# EAGLE board CatGenie120 (EAGLE 7.6.0)
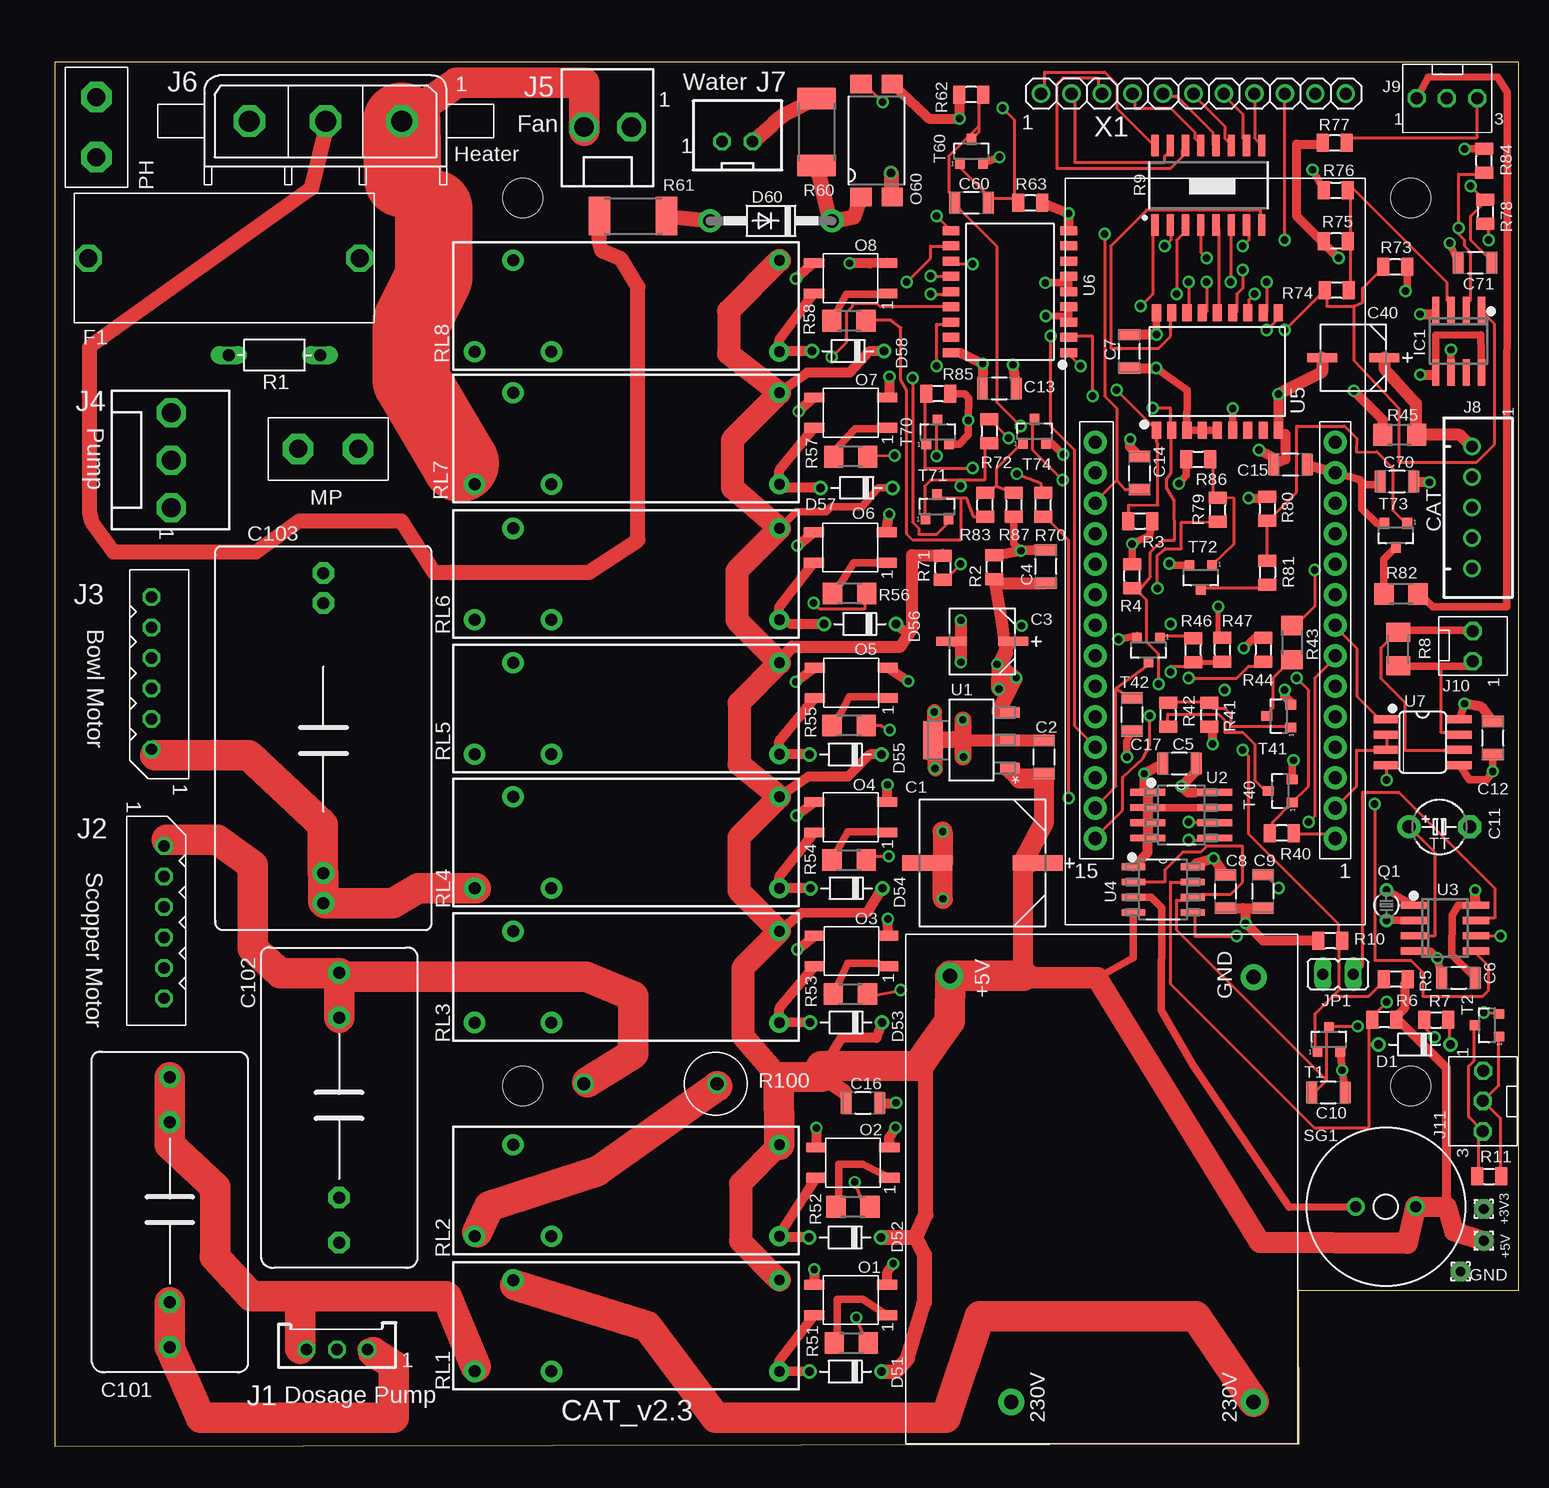
[diagram p0: board, top side]
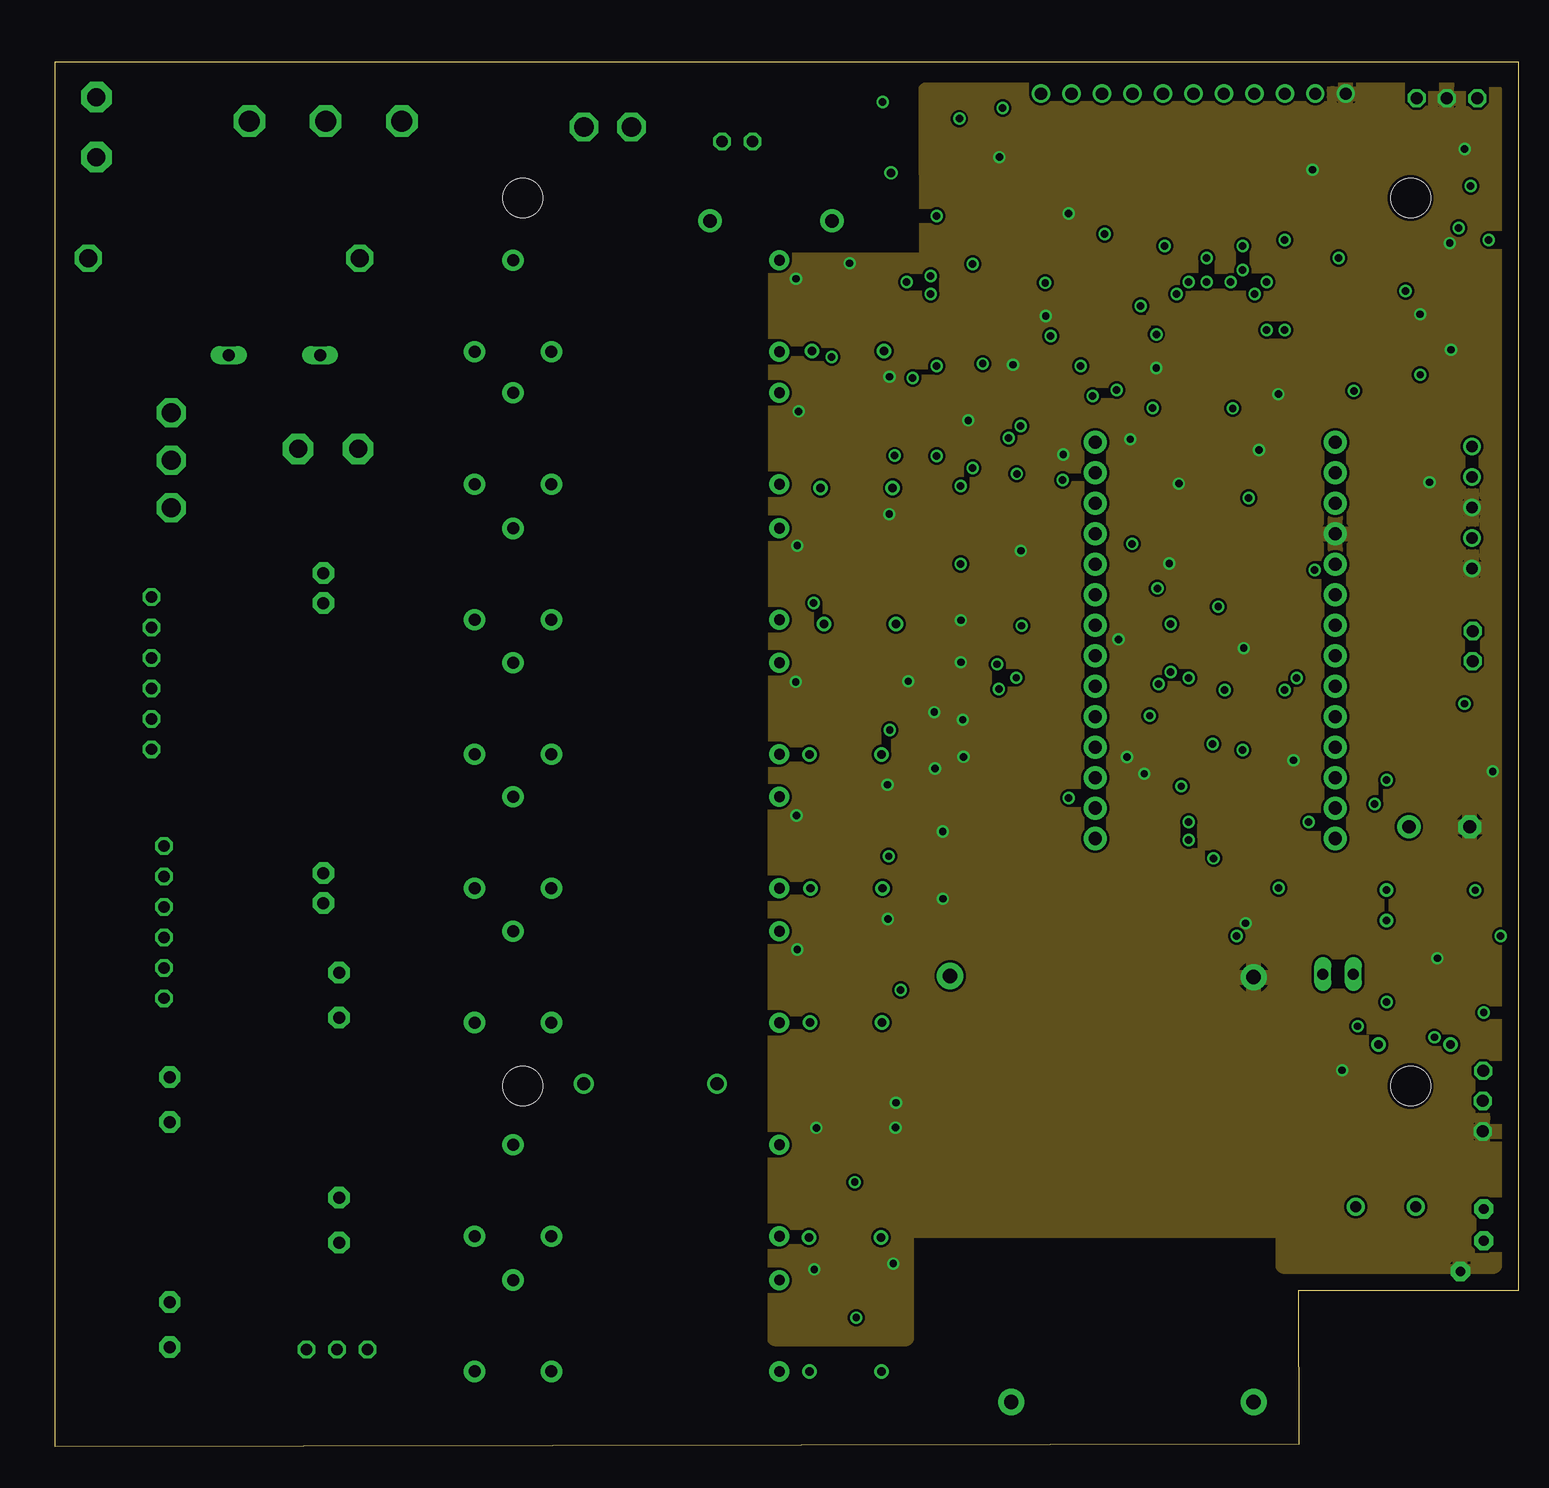
[diagram p1: board, inner layer Route2]
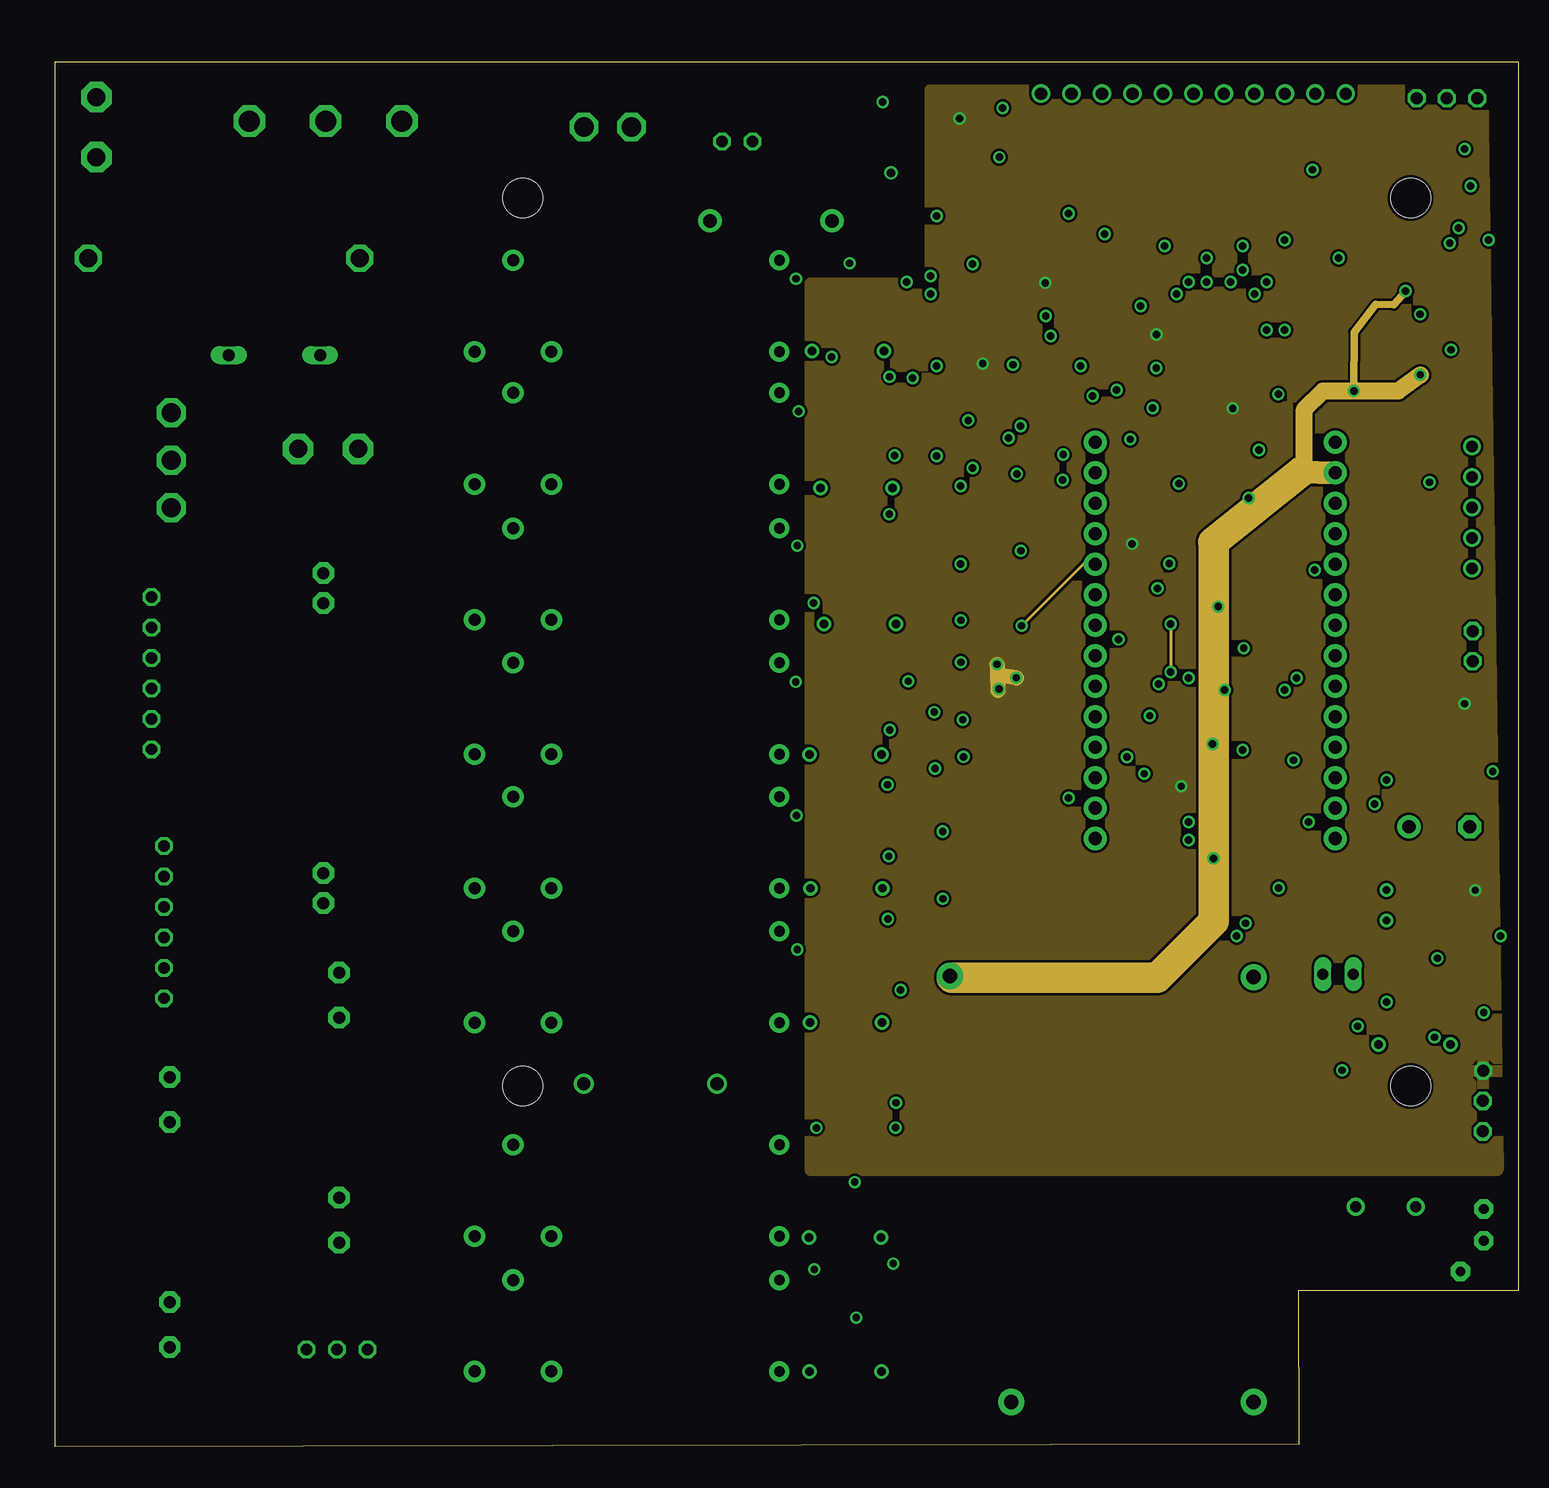
[diagram p2: board, inner layer Route15]
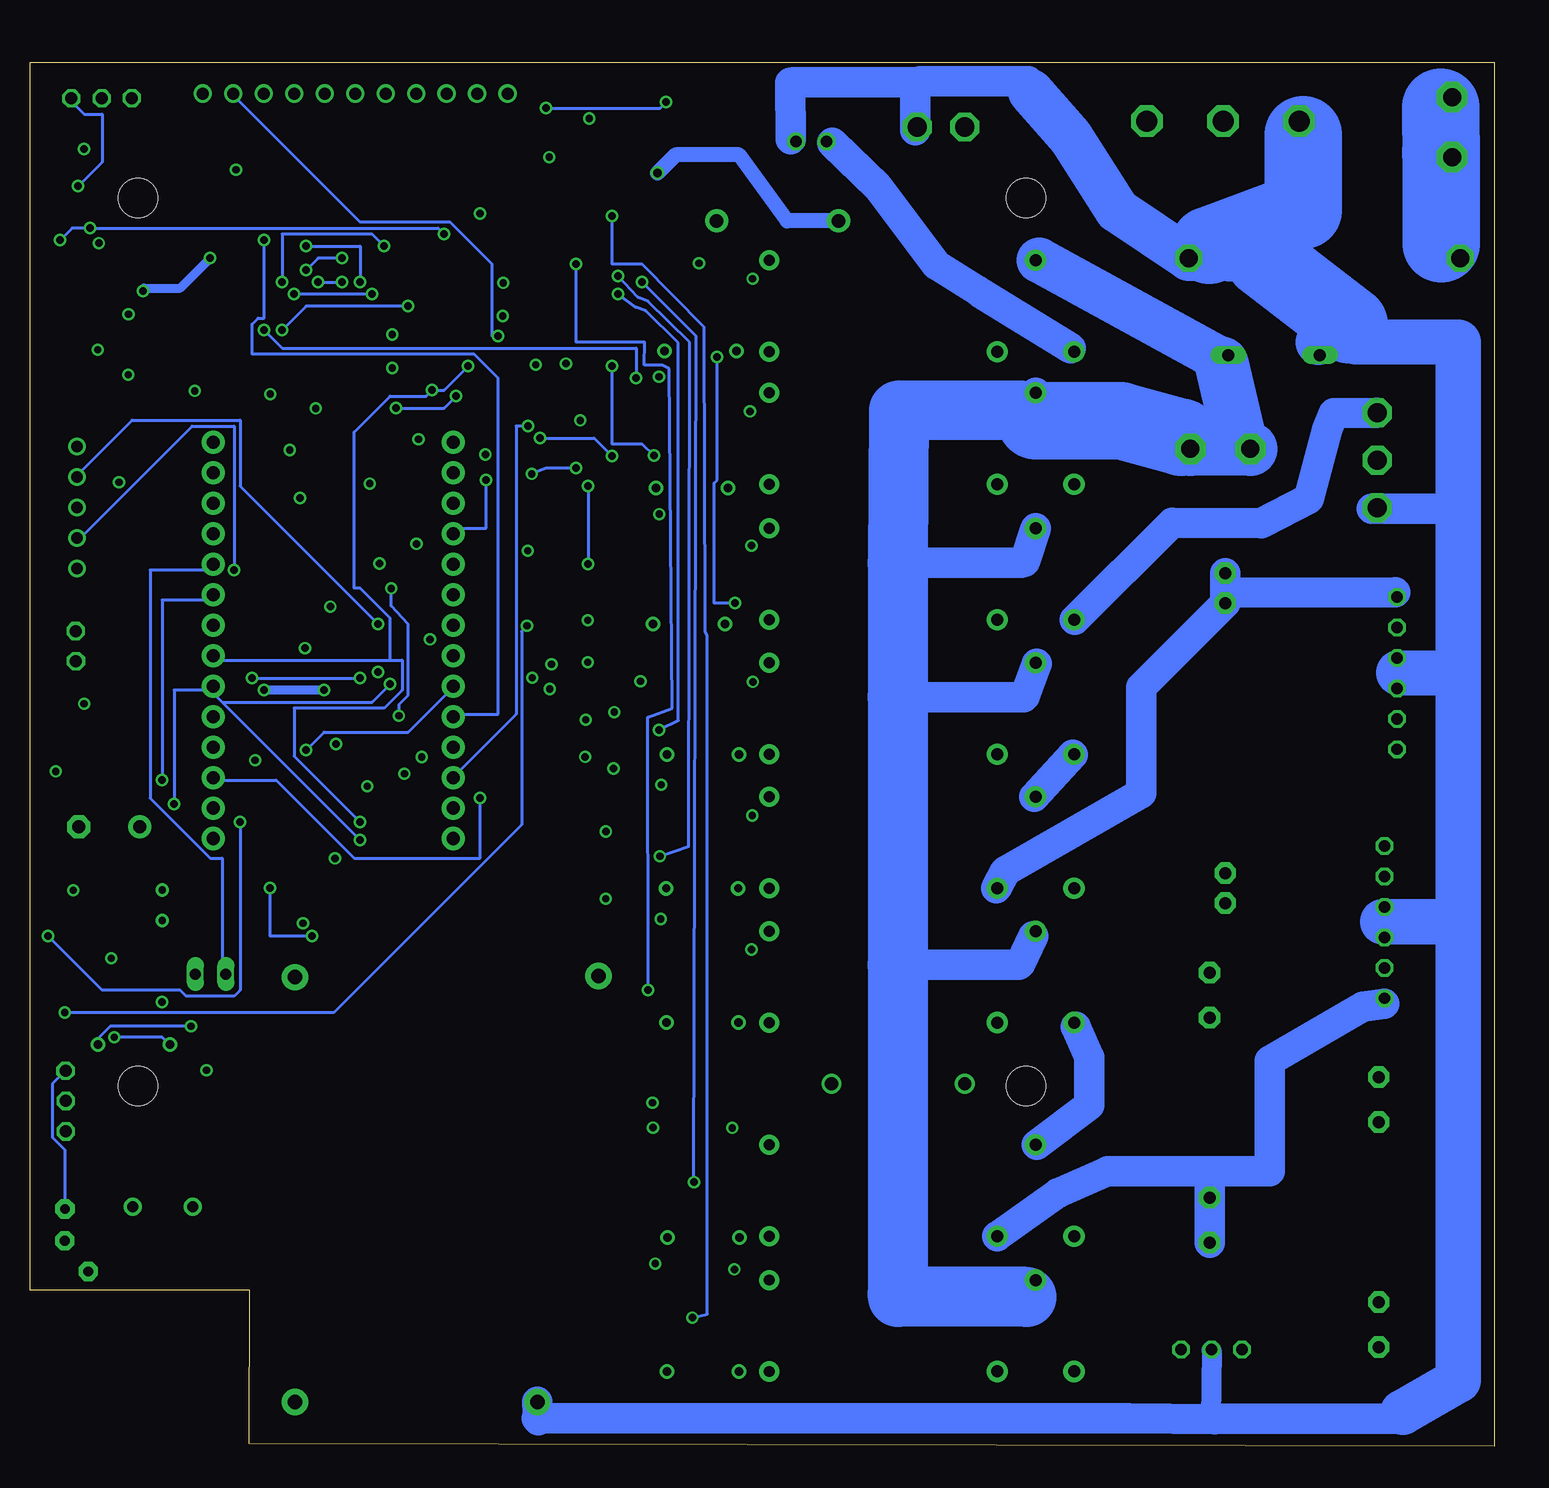
[diagram p3: board, bottom side, seen from below]

Size 122 x 115.3 mm. Coordinates in mm from the lower left corner, seen from the top.
Outline: 0,0 103.72,0.2 103.67,13 122,13 122,115.3 0,115.3 0,0
Copper layers (1+2*15+16): Top 0.035mm / dielectric 1.5mm / Route2 0.035mm / dielectric 0.15mm / Route15 0.035mm / dielectric 0.2mm / Bottom 0.035mm
Design rules "default *": minimum track width 10mil, minimum drill 24mil, track to track 8mil, track to pad 8mil, pad to pad 8mil, via to via 8mil, smd to smd 8mil, copper to edge 10mil, drill to drill 8mil, minimum pad ring 10mil, minimum via ring 8mil, stop-mask expansion 4mil, vias tented up to drill 0mil, thermal gap 10mil
Holes 3.3 mm at 39,30 113,30 113,104 39,104
tRestrict: area 0.4,0.4 to 72.6,114.9
bRestrict: area 0.8,0.5 to 72.6,115.2

## Footprints (pad centres in the part's own frame; a part is rotated, then mirrored left to right if it is on the bottom)
1,6/0,8 = drill 0.813 pad 1.6 octagon: 1 0,0
CAPAE1030X1050N = smd 4.166 x 1.3: 1 -4.6,0; 2 4.6,0
CAPC3216X88N = smd 0.914 x 1.803: 1 -1.397,0; 2 1.397,0
CAPAE530X610N = smd 2.5 x 0.762: 1 -2.6,0; 2 2.6,0
SUPERCAP-RM5 = drill 1.1 pad 1.93: + -2.54,0 | drill 1.1 pad 1.93 octagon: - 2.54,0
ANLAUF-KONDENSATOR-RM22 = drill 1 pad 1.778 octagon: 1 -11.25,0; 2 -7.5,0; 3 11.25,0; 4 7.5,0
ANLAUF-KONDENSATOR-RM37 = drill 1 pad 1.778 octagon: 1 -13.75,0; 2 -11.25,0; 3 13.75,0; 4 11.25,0
D-5 = drill 0.7: A 3,0; C -3,0
DO41-10 = drill 1.118 pad 1.93: A 5.08,0; C -5.08,0
SICHERUNGSHALTER = drill 1.5 octagon: 1 -11.3,0; 2 11.3,0
SO08 = smd 0.6 x 2.2: 1 -1.905,-2.6; 2 -0.635,-2.6; 3 0.635,-2.6; 4 1.905,-2.6; 5 1.905,2.6; 6 0.635,2.6; 7 -0.635,2.6; 8 -1.905,2.6
JST-EH-03-PIN = drill 0.95 octagon: 1 -2.54,0; 2 0,0; 3 2.54,0
5267-6 = drill 0.95 octagon: P$1 0,0; P$2 2.54,0; P$3 5.08,0; P$4 7.62,0; P$5 10.16,0; P$6 12.7,0
KK-156-3 = drill 1.6 octagon: 1 -3.96,0; 2 0,0; 3 3.96,0
KK-156-2 = drill 1.6 octagon: 1 -1.98,0; 2 1.98,0
SUPU-SERIE_B_1X3 = drill 1.75 octagon: 1 6.35,0; 2 0,0; 3 -6.35,0
JST-XH-02-PACKAGE-ROUND-PAD = drill 0.95 octagon: 1 -1.27,0; 2 1.27,0
JST-XH-05-PACKAGE-ROUND-PAD = drill 0.95: 1 -5.08,0; 2 -2.54,0; 3 0,0; 4 2.54,0; 5 5.08,0
MOLEX-1X3 = drill 1 octagon: 1 -1.294,0.03; 2 1.218,0.01; 3 3.758,0.01
MOLEX-1X2 = drill 1 octagon: 1 -1.294,0.03; 2 1.218,0.01
JP1 = drill 0.914 long: 1 0,-1.27; 2 0,1.27
GENUINOMKR1000 = drill 1.1 pad 1.93: P$1 20.32,7.4; P$2 17.78,7.4; P$3 15.24,7.4; P$4 12.7,7.4; P$5 10.16,7.4; P$6 7.62,7.4; P$7 5.08,7.4; P$8 2.54,7.4; P$9 0,7.4; P$10 -2.54,7.4; P$11 -5.08,7.4; P$12 -7.62,7.4; P$13 -10.16,7.4; P$14 -12.7,7.4; P$15 20.32,-12.6; P$16 17.78,-12.6; P$17 15.24,-12.6; P$18 12.7,-12.6; P$19 10.16,-12.6; P$20 7.62,-12.6; P$21 5.08,-12.6; P$22 2.54,-12.6; P$23 0,-12.6; P$24 -2.54,-12.6; P$25 -5.08,-12.6; P$26 -7.62,-12.6; P$27 -10.16,-12.6; P$28 -12.7,-12.6
FLACHSTECKER-1POLIG = drill 1.5 pad 2.54 octagon: 1 -2.5,0; 2 2.5,0
MOSFET-RELAIS = smd 0.813 x 1.676: 1 -1.524,-3.556; 2 1.016,-3.556; 3 1.016,2.54; 4 -1.524,2.54
SFH6106-3 = smd 1.78 x 1.55: 1 -1.3,-4.7; 2 1.3,-4.7; 3 1.3,4.7; 4 -1.3,4.7
TC26V = drill 0.61: 1 -1.27,0; 2 1.27,0
R-7,5 = drill 1 long: 1 -3.81,0; 2 3.81,0
WIEDERSTAND_802 = smd 1 x 1.5: 1 -1,0; 2 1,0
M1206 = smd 1.6 x 2: 1 -1.4,0; 2 1.4,0
SO16 = smd 0.6 x 1.8: 1 -4.445,-3.3; 2 -3.175,-3.3; 3 -1.905,-3.3; 4 -0.635,-3.3; 5 0.635,-3.3; 6 1.905,-3.3; 7 3.175,-3.3; 8 4.445,-3.3; 9 4.445,3.3; 10 3.175,3.3; 11 1.905,3.3; 12 0.635,3.3; 13 -0.635,3.3; 14 -1.905,3.3; 15 -3.175,3.3; 16 -4.445,3.3
R1206 = smd 1.6 x 1.803: 1 -1.422,0; 2 1.422,0
R2512 = smd 1.8 x 3.2: 1 -2.8,0; 2 2.8,0
R-STEHEND = drill 1.1: 1 0.1,0; 2 -11,0
G6RN-1-5VDC = drill 0.9 pad 1.676: 1 -11.4,-3.81; 5 -11.4,3.81 | drill 1 pad 1.778: 2 10.8,-3.81; 3 14,3.81; 4 7.6,3.81
PIEZZO-BUZZER1 = drill 0.9 pad 1.5: + 2.5,0; - -2.5,0
SOT23 = smd 0.8 x 0.9: 1 -0.95,-1; 2 0.95,-1; 3 0,1
IRLML2240 = smd 0.8 x 0.9: 1 -0.95,-1; 2 0.95,-1; 3 0,1
MCP1825S-3302E-SOT-223-3 = smd 1.626 x 0.889: 1 -3.2,2.311; 2 -3.2,0; 3 -3.2,-2.311 | smd 1.626 x 3.175: 4 3.2,0
24LC512-SOIC-8 = smd 2.9 x 0.559: 1 -2.8,1.905; 2 -2.8,0.635; 3 -2.8,-0.635; 4 -2.8,-1.905; 5 2.8,-1.905; 6 2.8,-0.635; 7 2.8,0.635; 8 2.8,1.905
DS1388 = smd 0.6 x 2.2: 1 -1.905,-2.6; 2 -0.635,-2.6; 3 0.635,-2.6; 4 1.905,-2.6; 5 1.905,2.6; 6 0.635,2.6; 7 -0.635,2.6; 8 -1.905,2.6
TLC555-SOIC-8 = smd 1.981 x 0.559: 1 -2.464,1.905; 2 -2.464,0.635; 3 -2.464,-0.635; 4 -2.464,-1.905; 5 2.464,-1.905; 6 2.464,-0.635; 7 2.464,0.635; 8 2.464,1.905
SO-18W = smd 0.762 x 1.4: 1 -5.08,-4.9; 2 -3.81,-4.9; 3 -2.54,-4.9; 4 -1.27,-4.9; 5 0,-4.9; 6 1.27,-4.9; 7 2.54,-4.9; 8 3.81,-4.9; 9 5.08,-4.9; 10 5.08,4.9; 11 3.81,4.9; 12 2.54,4.9; 13 1.27,4.9; 14 0,4.9; 15 -1.27,4.9; 16 -2.54,4.9; 17 -3.81,4.9; 18 -5.08,4.9
MAX3483 = smd 0.66 x 2.032: 1 -1.905,-3.073; 2 -0.635,-3.073; 3 0.635,-3.073; 4 1.905,-3.073; 5 1.905,3.073; 6 0.635,3.073; 7 -0.635,3.073; 8 -1.905,3.073
PMAS5-S05L = drill 1.2 pad 2.184: GND 20.4,-13.1; IN1 -15,7.1; IN2 -15,-13.1; OUT+ 20.5,12.2
1X11 = drill 1.016: 1 -12.7,0; 2 -10.16,0; 3 -7.62,0; 4 -5.08,0; 5 -2.54,0; 6 0,0; 7 2.54,0; 8 5.08,0; 9 7.62,0; 10 10.16,0; 11 12.7,0

## Placement (x,y rotation side)
+3V3  [1,6/0,8]  119.09,19.76 0 top
+5V  [1,6/0,8]  119.1,17.1 0 top
C1  1000UF  [CAPAE1030X1050N]  77.32,48.58 180 top
C2  100nF  [CAPC3216X88N]  82.45,57.42 270 top
C3  47UF  [CAPAE530X610N]  77.3,67.05 180 top
C4  100nF  [CAPC3216X88N]  82.59,73.31 270 top
C5  100nF  [CAPC3216X88N]  93.73,56.87 0 top
C6  100nF  [CAPC3216X88N]  117,39.01 0 top
C7  100nF  [CAPC3216X88N]  89.55,91.23 270 top
C8  100nF  [CAPC3216X88N]  97.57,46.22 90 top
C9  100nF  [CAPC3216X88N]  100.69,46.23 90 top
C10  10nF  [CAPC3216X88N]  106.14,29.46 180 top
C11  1,5F/3,6V  [SUPERCAP-RM5]  115.4,51.6 0 top
C12  100nF  [CAPC3216X88N]  119.85,59 90 top
C13  100nF  [CAPC3216X88N]  78.72,88.14 180 top
C14  10nF  [CAPC3216X88N]  90.4,81.07 270 top
C15  100nF  [CAPC3216X88N]  102.99,81.78 0 top
C16  100nF  [CAPC3216X88N]  67.37,28.58 180 top
C17  10nF  [CAPC3216X88N]  89.78,60.96 90 top
C40  47UF  [CAPAE530X610N]  108.22,90.7 180 top
C60  100nF  [CAPC3216X88N]  76.4,103.6 180 top
C70  100nF  [CAPC3216X88N]  111.87,80.37 0 top
C71  100nF  [CAPC3216X88N]  118.38,98.6 0 top
C101  100nF/440V  [ANLAUF-KONDENSATOR-RM22]  9.6,19.5 270 top
C102  100nF  [ANLAUF-KONDENSATOR-RM22]  23.7,28.2 270 top
C103  330nF  [ANLAUF-KONDENSATOR-RM37]  22.4,59 90 top
D1  1N4148  [D-5]  113.34,33.45 180 top
D51  1N4148  [D-5]  65.9,6.2 180 top
D52  1N4148  [D-5]  65.87,17.39 180 top
D53  1N4148  [D-5]  65.95,35.3 180 top
D54  1N4148  [D-5]  65.98,46.48 180 top
D55  1N4148  [D-5]  65.9,57.63 180 top
D56  1N4148  [D-5]  67.1,68.5 180 top
D57  1N4148  [D-5]  66.84,79.85 180 top
D58  1N4148  [D-5]  66.12,91.24 180 top
D60  1N4004  [DO41-10]  59.7,102.1 180 top
F1  10A  [SICHERUNGSHALTER]  14.12,99 0 top
GND  [1,6/0,8]  117.15,14.55 0 top
IC1  LM393D  [SO08]  117,92.07 180 top
J1  [JST-EH-03-PIN]  23.53,8.04 180 top
J2  5267-6  [5267-6]  9.12,50.01 270 top
J3  5267-6  [5267-6]  8.07,58.06 90 top
J4  [KK-156-3]  9.73,82.15 90 top
J5  [KK-156-2]  46.09,109.92 180 top
J6  SUPU-SERIE_B_1X3  [SUPU-SERIE_B_1X3]  22.58,110.41 0 top
J7  JST-XH-02-PIN-ROUND-PAD  [JST-XH-02-PACKAGE-ROUND-PAD]  56.9,108.7 0 top
J8  JST-XH-05-PIN-ROUND-PAD  [JST-XH-05-PACKAGE-ROUND-PAD]  118.1,78.2 270 top
J9  [MOLEX-1X3]  114.8,112.3 0 top
J10  MOLEX-1X2  [MOLEX-1X2]  118.2,66.7 90 top
J11  [MOLEX-1X3]  119.01,29.97 270 top
JP1  [JP1]  106.95,39.33 90 top
MKR1000  [GENUINOMKR1000]  99.33,70.94 270 top
MP  FLACHSTECKER-1POLIG  [FLACHSTECKER-1POLIG]  22.8,83.1 180 top
O1  G3VM-61G1  [MOSFET-RELAIS]  65.84,12.42 90 top
O2  [MOSFET-RELAIS]  66.02,23.87 90 top
O3  [MOSFET-RELAIS]  65.9,41.5 90 top
O4  [MOSFET-RELAIS]  65.83,52.65 90 top
O5  G3VM-61G1  [MOSFET-RELAIS]  65.88,63.85 90 top
O6  [MOSFET-RELAIS]  65.8,75.14 90 top
O7  [MOSFET-RELAIS]  65.83,86.37 90 top
O8  [MOSFET-RELAIS]  65.82,97.57 90 top
O60  SFH6106-3  [SFH6106-3]  68.5,108.8 0 top
PH  FLACHSTECKER-1POLIG  [FLACHSTECKER-1POLIG]  3.49,109.9 270 top
Q1  32,768kHz  [TC26V]  110.98,45.07 270 top
R1  VARISTOR-7,5  [R-7,5]  18.32,90.9 0 top
R2  10k  [WIEDERSTAND_802]  78.32,73.25 90 top
R3  3.3k  [WIEDERSTAND_802]  90.47,77.08 0 top
R4  3.3k  [WIEDERSTAND_802]  89.79,72.5 90 top
R5  4k7  [WIEDERSTAND_802]  111.75,38.9 180 top
R6  18k  [WIEDERSTAND_802]  110.81,35.53 180 top
R7  18k  [WIEDERSTAND_802]  115.14,35.51 0 top
R8  180R  [M1206]  111.98,66.41 270 top
R9  150R  [SO16]  96.15,105.06 0 top
R10  4k7  [WIEDERSTAND_802]  106.31,42.11 180 top
R11  47k  [WIEDERSTAND_802]  119.55,22.46 0 top
R40  220R  [WIEDERSTAND_802]  102.26,51.08 180 top
R41  560R  [WIEDERSTAND_802]  96.2,60.94 90 top
R42  1k  [WIEDERSTAND_802]  92.79,60.94 270 top
R43  180R  [R1206]  103.12,66.95 90 top
R44  4k7  [WIEDERSTAND_802]  100.72,66.36 270 top
R45  100R  [R1206]  112.1,84.27 0 top
R46  220R  [WIEDERSTAND_802]  94.88,66.33 90 top
R47  10k  [WIEDERSTAND_802]  97.32,66.36 90 top
R51  270R  [R1206]  66.39,8.59 180 top
R52  270R  [R1206]  66.53,19.94 180 top
R53  270R  [R1206]  66.31,37.67 180 top
R54  270R  [R1206]  66.21,48.83 180 top
R55  270R  [R1206]  66.21,60.03 0 top
R56  270R  [R1206]  66.25,71.03 0 top
R57  270R  [R1206]  66.34,82.44 0 top
R58  270R  [R1206]  66.19,93.77 0 top
R60  13k/250V/3W  [R2512]  63.5,109.5 270 top
R61  13k/250V/3W  [R2512]  48.2,102.5 0 top
R62  4k7  [WIEDERSTAND_802]  76.39,112.62 180 top
R63  1M  [WIEDERSTAND_802]  81.3,103.59 180 top
R70  220R  [WIEDERSTAND_802]  82.39,78.43 90 top
R71  560R  [WIEDERSTAND_802]  74.03,73.2 90 top
R72  1k  [WIEDERSTAND_802]  77.89,84.56 270 top
R73  1k  [WIEDERSTAND_802]  111.71,98.26 180 top
R74  100k  [WIEDERSTAND_802]  106.83,96.32 180 top
R75  47k  [WIEDERSTAND_802]  106.78,100.41 180 top
R76  47k  [WIEDERSTAND_802]  106.75,104.65 0 top
R77  4k7  [WIEDERSTAND_802]  106.67,108.59 180 top
R78  220R  [WIEDERSTAND_802]  119.22,102.87 270 top
R79  220R  [WIEDERSTAND_802]  96.93,78.01 90 top
R80  560R  [WIEDERSTAND_802]  101.05,78.09 270 top
R81  1k  [WIEDERSTAND_802]  101.07,72.79 270 top
R82  200R  [R1206]  112.2,71.01 0 top
R83  220R  [WIEDERSTAND_802]  77.54,78.43 90 top
R84  10k  [WIEDERSTAND_802]  119.12,107.12 90 top
R85  4k7  [WIEDERSTAND_802]  73.62,87.68 180 top
R86  4k7  [WIEDERSTAND_802]  95.3,82.24 0 top
R87  47k  [WIEDERSTAND_802]  79.93,78.43 270 top
R100  2,4k/3W/600V  [R-STEHEND]  55.1,30.2 0 top
RL1  [G6RN-1-5VDC]  49,10.02 180 top
RL2  [G6RN-1-5VDC]  49,21.29 180 top
RL3  [G6RN-1-5VDC]  49,39.09 180 top
RL4  [G6RN-1-5VDC]  49,50.29 180 top
RL5  [G6RN-1-5VDC]  49,61.46 180 top
RL6  [G6RN-1-5VDC]  49,72.66 180 top
RL7  [G6RN-1-5VDC]  49,83.96 180 top
RL8  [G6RN-1-5VDC]  49,95 180 top
SG1  [PIEZZO-BUZZER1]  110.94,19.94 0 top
T1  BSS138P  [SOT23]  106.19,33.88 0 top
T2  BSS138P  [SOT23]  119.37,35.06 90 top
T40  BSS138P  [SOT23]  102.13,54.58 90 top
T41  IRLML2244  [IRLML2240]  102.02,60.82 90 top
T42  BSS138P  [SOT23]  91.16,66.33 180 top
T60  BSS138P  [SOT23]  76.4,107.9 0 top
T70  BSS138P  [SOT23]  73.59,84.5 0 top
T71  IRLML2244  [IRLML2240]  73.53,78.28 0 top
T72  BSS138P  [SOT23]  95.51,72.38 180 top
T73  IRLML2244  [IRLML2240]  111.77,75.89 180 top
T74  BSS138P  [SOT23]  81.66,84.57 0 top
U1  MCP1825S-3302E/DB  [MCP1825S-3302E-SOT-223-3]  76.4,58.82 180 top
U2  24LC512-E/SN  [24LC512-SOIC-8]  93.89,52.57 0 top
U3  DSS1388  [DS1388]  115.86,43.16 270 top
U4  TLC555CDR  [TLC555-SOIC-8]  92.37,46.37 0 top
U5  MCP23S08SO  [SO-18W]  96.9,89.54 0 top
U6  MCP23008SO  [SO-18W]  79.6,96.2 90 top
U7  MAX3483ECSA+T  [MAX3483]  114,58.65 270 top
U$1  PMAS5 S05-L  [PMAS5-S05L]  86.82,18.67 90 top
X1  [1X11]  94.9,112.7 0 top

## Library data of the parts
+3V3 +5V GND = wirepad
C1 = Panasonic-EEE0_EEE1_EEE2_EEEFC; MPN: EEE-FC1C221AP; OC_FARNELL: 1244354; OC_NEWARK: 12M9811; PACKAGE: CASE-G; SUPPLIER: PANASONIC; TOLERANCE: 20%; VALUE: 220UF; VOLTAGERATING: 16V
C2 C4-C10 C12-C17 C60 C70 C71 = my_library1; MPN: C1206C104K5RACTU; OC_FARNELL: 1414715; OC_NEWARK: 70K9167; SUPPLIER: Kemet; TOLERANCE: ±10%; VOLTAGERATING: 50V
C3 C40 = Panasonic-EEE0_EEE1_EEE2_EEEFC; MPN: EEE-0JA470SR; OC_FARNELL: 9696890; OC_NEWARK: 96K9425; PACKAGE: CASE-C; SUPPLIER: PANASONIC; TOLERANCE: 20%; VOLTAGERATING: 6.3V
C11 C101-C103 F1 J6 J9-J11 MKR1000 MP O1-O8 O60 PH R2-R7 R10 R11 R40-R42 R44 R46 R47 R62 R63 R70-R81 R83-R87 R100 RL1-RL8 T1 T2 T40-T42 T60 T70-T74 U2 U3 U7 U$1 = my_library1
D1 D51-D58 = diode
D60 = adafruit
IC1 = linear
J1 J7 J8 = JST XH Connectors v1-0
J2 J3 = con-molex-spox
J4 J5 = con-molex; OC_FARNELL: unknown; OC_NEWARK: unknown
JP1 = jumper
Q1 = adafruit; OC_FARNELL: unknown; OC_NEWARK: unknown
R1 = varistor
R8 = resistor
R9 = resistor-bourns; OC_FARNELL: unknown; OC_NEWARK: unknown
R43 R45 R51-R58 R60 R61 R82 = rcl
SG1 = my_library1; OC_FARNELL: unknown; OC_NEWARK: unknown
U1 = my_library1; MPN: MCP1825S-3302E/DB; OC_FARNELL: 1578404; OC_NEWARK: 26M9961; PACKAGE: SOT-223-3; SUPPLIER: Microchip
U4 = my_library1; MPN: NE555D; OC_FARNELL: 9589880; OC_NEWARK: 08F2512; PACKAGE: 8-SOIC; SUPPLIER: Texas Instruments
U5 U6 = microchip-dspic
X1 = pinhead

## Nets
230V: F1.2 J1.2 J2.P$3 J2.P$4 J3.P$3 J3.P$4 J4.1 J5.1 J6.3 J7.2 R1.1 R60.1 U$1.IN1
+3V3 [VCC3]: +3V3.1 C3.1 C4.2 C5.2 C6.2 C7.1 C12.2 C13.2 J11.1 O60.3 R2.1 R3.2 R4.2 R62.2 U1.3 U2.8 U3.8 U5.6 U5.18 U6.5 U6.6 U6.18 U7.8
+5V/1 [VCC5]: +5V.1 C1.1 C2.2 C8.2 C15.2 C16.2 C70.1 D51.C D52.C D53.C D54.C D55.C D56.C D57.C D58.C IC1.5 IC1.8 MKR1000.P$13 R5.1 R6.1 R41.1 R45.1 R47.2 R71.2 R73.1 R75.2 R77.2 R80.1 RL1.1 RL2.1 RL3.1 RL4.1 RL5.1 RL6.1 RL7.1 RL8.1 SG1.+ T41.2 T73.2 U1.1 U4.4 U4.8 U$1.OUT+
CATLED: MKR1000.P$1 R40.1
CATSENSOR: C17.2 MKR1000.P$16 T42.3
DRYERFUSE: C60.2 MKR1000.P$17 R62.1 T60.3
GND [GND]: C1.2 C2.1 C3.2 C4.1 C5.1 C6.1 C7.2 C8.1 C9.1 C10.1 C11.- C12.1 C13.1 C14.1 C15.1 C16.1 C17.1 C40.2 C70.2 C71.1 GND.1 IC1.4 IC1.6 J8.3 J8.5 J9.2 J11.3 MKR1000.P$11 O1.2 O1.3 O2.2 O2.3 O3.2 O3.3 O4.2 O4.3 O5.2 O5.3 O6.2 O6.3 O7.2 O7.3 O8.2 O8.3 R2.2 R10.2 R11.1 R44.1 R63.1 R76.1 R84.2 R85.1 R86.1 R87.2 T1.2 T2.3 T40.2 T42.2 T60.2 T70.2 T72.2 T74.2 U1.2 U1.4 U2.1 U2.2 U2.3 U2.4 U2.7 U3.4 U4.1 U5.3 U5.4 U5.5 U5.9 U6.3 U6.4 U6.9 U7.5 U$1.GND X1.11
MP: MP.1 MP.2 R1.2 RL1.2 RL3.2 RL5.2 RL6.2 RL7.2 RL8.2 U$1.IN2
N$1: O1.1 R51.2
N$2: O2.1 R52.2
N$3: O3.1 R53.2
N$4: O4.1 R54.2
N$5: O5.1 R55.1
N$6: SG1.- U4.3
N$7: O6.1 R56.1
N$8: O7.1 R57.1
N$9: R58.2 R83.1 T71.3
N$10: C71.2 J9.3 R77.1 R78.1
N$11: O8.1 R58.1
N$12: R51.1 U6.10
N$13: R52.1 U6.11
N$14: R53.1 U6.12
N$15: R54.1 U6.13
N$16: R82.1 T73.3
N$17: R71.1 R72.2 T71.1
N$18: R57.2 U6.16
N$19: R56.2 U6.15
N$20: R55.2 U6.14
N$21: J7.1 RL8.3
N$22: C101.1 C101.2 J1.3 RL1.3
N$23: D51.A O1.4 RL1.5
N$24: D52.A O2.4 RL2.5
N$25: D53.A O3.4 RL3.5
N$26: D55.A O5.4 RL5.5
N$27: C9.2 U4.5
N$28: R100.1 RL2.3
N$29: D54.A O4.4 RL4.5
N$30: C60.1 O60.4 R63.2 T60.1
N$31: C10.2 D1.C R7.2 T1.3 U4.2 U4.6
N$32: MKR1000.P$20 R5.2 R10.1 T1.1
N$33: C101.3 C101.4 J1.1
N$34: C102.1 C102.2 J2.P$1 R100.2
N$35: C102.3 C102.4 J2.P$6 RL2.4
N$36: RL2.2 RL3.3
N$37: C103.1 C103.2 J3.P$1 RL4.3
N$38: C103.3 C103.4 J3.P$6 RL4.4
N$39: RL4.2 RL5.3
N$40: D56.A O6.4 RL6.5
N$41: D57.A O7.4 RL7.5
N$42: JP1.2 MKR1000.P$10
N$43: D58.A O8.4 RL8.5
N$44: R9.1 U5.10
N$45: J8.4 R43.2
N$46: J4.3 RL6.3
N$47: J5.2 J6.1 RL7.3
N$48: R9.2 U5.11
N$49: R9.3 U5.12
N$50: R9.4 U5.13
N$51: R9.16 X1.1
N$52: R9.15 X1.2
N$53: R9.14 X1.3
N$54: R9.13 X1.4
N$55: Q1.1 U3.1
N$56: Q1.2 U3.2
N$57: JP1.1 U3.7
N$58: D1.A R6.2 R7.1 U4.7
N$59: R9.5 U5.14
N$60: R9.12 X1.5
N$61: R9.6 U5.15
N$62: R9.11 X1.6
N$63: R9.7 U5.16
N$64: R9.8 U5.17
N$65: R9.10 X1.7
N$66: R9.9 X1.8
N$67: MKR1000.P$19 X1.9
N$68: MKR1000.P$18 X1.10
N$69: D60.A O60.2 R61.2
N$70: R80.2 R81.1 T73.1
N$71: C11.+ U3.3
N$72: D60.C O60.1 R60.2
N$73: J6.2 R61.1
N$74 [VCC5]: C40.1 J8.1 R45.2
N$75: J11.2 R11.2 T2.1
N$76: IC1.3 R74.1 R75.1 R76.2
N$77: J10.1 R8.2 U7.7
N$78: J10.2 R8.1 U7.6
N$79: MKR1000.P$9 U7.4
N$80: MKR1000.P$8 U7.1
N$81: MKR1000.P$2 U7.2 U7.3
N$82: R43.1 T41.3
N$83: R40.2 R44.2 T40.1
N$84: J9.1 R82.2
N$85: R42.2 T40.3
N$86: R41.2 R42.1 T41.1
N$87: R83.2 R87.1 T74.1
N$88: J8.2 R46.1 R47.1
N$89: R46.2 T42.1
N$90: R70.2 R85.2 T70.1
N$91: R79.2 R86.2 T72.1
N$92: R81.2 T72.3
N$93: R72.1 T70.3
N$94: IC1.1 R73.2 R74.2 T71.2
N$95: MKR1000.P$24 T2.2
PH: F1.1 PH.1 PH.2
SCL: MKR1000.P$7 R3.1 U2.6 U3.6 U5.1 U6.1
SDA: MKR1000.P$6 R4.1 U2.5 U3.5 U5.2 U6.2
WATERLED: MKR1000.P$15 R79.1
WATERON: MKR1000.P$3 R70.1
WATERSENSOR: C14.2 IC1.2 MKR1000.P$26 R78.2 R84.1
WATERVALVE: MKR1000.P$25 T74.3

## Tracks (layer width: path | path; a pad name or v marks a point on that pad's centre or on a via)
230V
  Top 0.61: 60,110.32 59.8,110.1
  Top 1.27: R60.1 60.79,110.92 60,110.32 | 59.8,110.1 J7.2
  Bottom 0.406: 79.77,2.33 79.65,2.16 | R1.1 14.66,91.99 | 25.1,98.85 23.74,100.05 | 15.89,109.26 16.23,109.26 J6.3 | J2.P$3 10,44.91 9.26,43.69 9.68,43.6 J2.P$4 | J3.P$4 8.95,65.7 7.92,64.43 8.82,64.3 J3.P$3 | 48.23,110.25 47.96,110.25 J5.1 48.22,109.64 | 10.2,78.12 9.79,78.56 J4.1 | 23.53,8.32 23.54,7.97 23.53,7.97 J1.2 | 38.82,113.71 39.89,113.7 38.68,112.49 38.64,112.49 38.62,112.84 | 48.34,113.66 48.34,113.71 47.81,113.71 48.22,113.01 | 58.4,113.66 58.66,113.62
  Bottom 1.27: 7.61,2.83 6.62,3.1 7.87,2.29 | 58.62,108.89 J7.2
  Bottom 1.676: 23.54,7.97 23.61,2.27
  Bottom 1.778: 23.61,2.27 23.26,2.23
  Bottom 2.54: 7.87,2.29 23.61,2.27 | 23.26,2.23 30.49,2.32 79.77,2.33 | 58.66,113.62 58.62,108.89 | 10.2,78.12 3,78.09 | 79.65,2.16 U$1.IN1 | 38.82,113.71 47.81,113.71 | 48.34,113.66 58.4,113.66 | 48.22,109.64 48.22,113.01
  Bottom 3: 3,64.7 2.96,64.41 3,64.2 | 19.14,98.88 25.1,98.85
  Bottom 3.81: 3,64.7 3,78.09 3,92 11.54,92.04 12.05,93.42 14.66,91.99 | 3,64.2 3,43.7 | 3,43.7 3,5.5 7.61,2.83 | 9.26,43.69 3,43.7 | 19.14,98.88 F1.2 31.4,103 35.27,109.07 38.62,112.84 | 7.92,64.43 2.96,64.41
  Bottom 6.452: 12.05,93.42 19.14,98.88 | 23.74,100.05 15.88,102.98 15.89,109.26
+3V3  (via drill 0.61)
  Top 0.406: R2.1 78.66,71.91
  Top 0.61: U2.8 96.28,54.44 95.04,54.44 | R3.2 91.27,75.88 v89.79,75.18 R4.2 | C6.2 116.43,40.94 116.45,44.21 116.96,45.05 U3.8 118.42,45.06 | U7.8 v117.49,61.86 | U5.18 v91.82,92.63 | U6.18 75.51,91.1 | U6.6 84.5,96.92 | 84.5,96.92 U6.5 | v82.56,96.93 84.5,96.92 | U5.6 v98.18,86.47 | 118.39,45.06 118.42,45.06 | 118.42,45.06 118.42,45.45 118.39,45.45
  Top 0.813: C3.1 79.22,66.1 | C5.2 95.13,56.22 v93.89,54.98 94.43,54.44 95.04,54.44 | C12.2 118.91,61.59 v117.49,61.86 | C7.1 v91.82,92.63 | 75.51,91.1 v77.34,90.2 C13.2 | O60.3 72.64,110.83 72.85,110.62 v75.4,110.62 R62.2 | 118.39,45.45 v118.39,46.31
  Top 1.016: 78.72,65.01 v78.54,65.14 | 78.68,61.2 U1.3 | R2.1 78.99,68.32 79.22,66.1 | 78.66,71.91 C4.2
  Top 1.27: 79.22,66.1 78.72,65.01 | v78.69,63.08 78.72,65.06 80.05,63.98 78.68,61.2
  Route15 0.406: 78.6,62.96 v78.69,63.08
  Route15 0.813: 78.58,63.42 v78.69,63.08
  Route15 1.27: v78.54,65.14 78.56,64.23 | 78.56,64.23 78.6,62.96 | v80.14,64.02 78.56,64.23
  Bottom 0.254: +3V3.1 119.1,19.77 119.1,24.69 120.13,25.72 120.13,30.18 119.1,31.2 J11.1
  pour Route15: 73,113 118.96,113 120.25,23 63,23 63,96.89 64.01,96.9 73,96.9
+5V/1  (via drill 0.61)
  Top 0.406: U1.1 79.1,56.12 79.95,55.36 80.39,55.63 | 64.51,32.33 64.27,30.51 | R47.2 96.97,67.36 v96.97,69.95
  Top 0.61: U4.8 94.84,48.27 95.12,48.55 | U4.4 89.91,40.68 86.92,39.02 86.93,38.9 | 80.92,39.02 80.7,39.24 | T73.2 110.16,76.89 108.94,78.11 108.94,80.11 | 108.94,80.11 108.79,80.53 MKR1000.P$13 | C70.1 109.95,80.11 108.94,80.11 | 114.89,89.27 IC1.5 115.09,90.91 115.09,92.57 118.86,92.59 118.87,90.98 118.87,89.5 IC1.8 | R73.1 112.7,96.42 v112.58,96.25 | C16.2 65.97,28.98 65.46,29.49 65.84,29.49 | D57.C 68.63,79.86 67.32,78.27 64.72,78.27 64.32,77.87 61.8,77.87 RL6.1
  Top 0.762: R77.2 105.5,108.5 103.5,108.5 103.5,102.5 105.5,100.5 R75.2 106,100 v107,99 | R5.1 112.5,38.5 112.5,36.5 112,36 R6.1 112,35.5 116,31.5 116,19.94 | v102.5,63 102.5,62.5 103,62 T41.2 | 74,74.24 R71.2 | v96.5,58.5 96.5,59.5 R41.1 | v99.5,79 101,79 R80.1
  Top 0.813: 80.7,47.68 C1.1 80.51,48.8 80.75,48.73 | 82.45,55.63 C2.2 | C8.2 v96.58,48.97 95.12,48.55 | C15.2 MKR1000.P$13 | v113.81,89.27 114.89,89.27 | RL3.1 62.23,44.42 67.77,44.46 D54.C | D53.C 68.48,34.02 65.6,34.01 64.51,32.33 | D55.C 67.94,57.63 66.1,55.79 62.81,55.79 RL4.1 | D56.C 71.19,67.66 | D58.C 67.89,91.24 66.28,89.45 62.7,89.45 RL7.1 | R45.1 110.68,85.52 v108.27,87.93
  Top 1.016: 74,74.24 71.45,74.24 71.45,68.05 71.19,67.66 70.5,66.61 61.43,66.61 RL5.1
  Top 1.27: 65.84,29.49 64.27,30.51 63.9,30.76 | D52.C 71.77,17.39 | 71.77,17.39 72.6,19.27 72.6,31.66 73.32,33.6 | D51.C 70.13,6.24 71.06,7.28 72.47,11.94 72.47,15.96 71.77,17.39
  Top 1.676: 80.7,39.17 80.7,39.24 80.7,47.68 | 80.75,48.73 82.45,51.97 82.45,55.63 80.39,55.63 | SG1.+ 116,19.94 116.6,17.88 +5V.1
  Top 1.778: 86.92,39.02 80.92,39.02 | SG1.+ 112.73,16.9 100.43,16.96 86.93,38.9
  Top 1.93: RL8.1 56.16,94.57 56.16,91.03 RL7.1 56.47,83.84 56.47,79.85 RL6.1 56.85,72.92 56.85,68.82 RL5.1 57.04,61.91 57.04,56.81 RL4.1 57.02,50.72 57.02,46.28 RL3.1 57.35,39.85 57.35,34.19 60.33,30.74 | RL2.1 57.16,21.86 57.16,17.07 RL1.1
  Top 2.54: RL2.1 60.33,30.74 63.9,30.76 63.87,31.64 71.69,31.69 71.96,31.69 73.32,33.6 74.6,35.4 U$1.OUT+ 80.7,39.17
  Route15 0.406: 91.94,38.8 91.72,39.02 | v97.5,63 96.97,63 v96.97,69.95 | 108.25,87.93 108.25,87.94 v108.26,87.93 v108.27,87.93
  Route15 0.61: 74.77,39.02 U$1.OUT+ | 96.58,75.29 96.54,75.33 | 103.88,81.18 104.15,81.45 | v112.58,96.25 111.6,95.1 110.09,95.13 108.3,92.83 v108.27,87.93
  Route15 0.762: v97.5,63 96.58,63 | v96.5,58.5 96.58,58.5 | v99.5,79 100.14,78.2
  Route15 1.422: 104.15,81.45 104.15,86.38 105.7,87.93 v108.27,87.93 111.97,87.93 v113.81,89.27
  Route15 1.93: 103.88,81.18 MKR1000.P$13
  Route15 2.54: 74.77,39.02 91.72,39.02 91.87,39.02 96.58,43.73 v96.58,48.97 96.58,58.5 96.58,63 96.58,75.29 | 96.54,75.33 100.14,78.2 103.88,81.18
  Bottom 0.762: v107,99 109.5,96.5 112.5,96.5 v112.58,96.25 | v97.5,63 v102.5,63
CATLED
  Top 0.254: R40.1 103.5,51 106.5,51 MKR1000.P$1
CATSENSOR
  Top 0.254: 88.44,63.09 91,65 T42.3 | 88.44,63.09 88.44,55 87,53.5 MKR1000.P$16 | 88.44,63.09 C17.2
DRYERFUSE  (via drill 0.61)
  Top 0.254: T60.3 77,109.5 77,110 | 77,110 77,112.5 R62.1 | 77,110 74.5,107.5 74.5,104.5 75,104 C60.2 75,103.5 78.5,100 78.5,87 v80.5,85
  Bottom 0.254: v80.5,85 81.5,85 81.5,61 86.5,56 MKR1000.P$17
GND  (via drill 0.61)
  Top 0.254: T2.3 118.3,34.98 118.3,32.12 117.84,31.66 117.84,27.43 118.99,26.29 J11.3 118.99,26.18 118.64,25.83 118.64,22.52 R11.1
  Top 0.406: v75.52,65.32 75.5,65.59 | 75.5,60.84 arc90 75.98,60.36 | U1.2 | 74.02,48.6 v74,51.2 | 74.01,48.55 C1.2 | 115.11,94.69 IC1.4 | 114.52,80.37 v114.58,80.31
  Top 0.508: 76,58.82 76,59 75.68,58.95
  Top 0.61: C6.1 v115.23,40.64 114.67,41.23 U3.4 | C12.1 v119.85,56.22 119.34,55.53 117.88,55.54 U7.5 | v91.81,89.83 94.4,87.97 U5.3 U5.4 U5.5 | T60.2 v78.73,107.41 | T1.2 v107.29,31.31 C10.1 | U6.4 84.5,94.16 | 84.5,94.16 U6.3 | v82.6,94.17 84.5,94.16 | 73.32,61.19 v73.31,61.16 | v73.37,56.46 73.4,56.43 | U5.9 102.57,84.34 | 114.73,94.31 IC1.4 | v116.36,91.35 116.36,89.55 IC1.6 | T42.2 90.21,67.53 v88.66,67.22 | T74.2 83.1,83.57 v84.05,82.62 | T40.2 103.13,57.03 v103.24,57.14 | R44.1 99.96,67.36 v99.09,66.49 | R85.1 75.84,87.68 76.16,87.31 v76.14,85.47 v76.13,85.46 76.13,84.26 75.37,83.5 T70.2 | C71.1 v116.26,100.24 | T72.2 93.04,73.38 arc-90 v92.88,73.54 | R84.2 117.54,108.12 arc90 v117.5,108.08 | R86.1 94.29,80.89 v93.69,80.2 | R76.1 v104.83,106.35 | U2.2 U2.7 | 70.12,28.58 v70.12,28.61 | 100.41,82.99 100.43,83.19 v100.36,83 | R87.2 79.93,75.19 v80.52,74.6 | v89.36,57.42 89.36,58.72 C17.1
  Top 0.813: O7.2 69.58,87.49 v69.58,89.1 | O6.2 69.32,76.23 v69.56,77.66 | O8.2 67.94,98.55 v66.25,98.56 | v61.78,97.27 O8.3 | v62,86.22 O7.3 | v61.88,75.03 O6.3 | v61.76,63.68 O5.3 | O5.2 v71.13,63.73 | v61.82,52.54 O4.3 | O4.2 v69.4,55.11 | v61.88,41.37 O3.3 | O3.2 v69.44,43.92 | O2.2 69.54,25.7 v70.08,26.53 | v63.48,26.51 O2.3 | O1.2 69.39,14.51 v69.89,15.2 | v63.3,14.72 O1.3 | C3.2 75.52,66.85 | 75.98,60.36 75.98,58.82 | C5.1 v90.8,56.02 90.8,54.77 U2.1 U2.2 U2.3 U2.4 91.09,49.46 U4.1 | C8.1 99.05,44.83 | 99.05,44.83 C9.1 | 99.05,44.83 99.25,44.63 v99.25,43.56 100.7,42.11 R10.2 | C7.2 v91.81,89.83 | v101.98,87.66 U5.9 | v79.86,90.11 C13.1 | U6.9 v84.5,102.71 R63.1 | R2.2 v80.52,74.6 C4.1 | 102.57,84.34 102.57,82.23 C15.1 | v113.79,94.31 114.73,94.31 | C70.2 114.52,80.37 | C16.1 70.12,28.58 | 100.41,82.99 101.51,82.42 | C14.1 89.63,83.24 v89.63,83.89
  Top 1.016: v75.52,68.81 75.52,66.85 v75.52,65.32 | 75.98,58.82 76,58.82 U1.2 | U1.2 C2.1 | C40.2 105.63,89.49 v101.98,87.66
  Top 1.27: 73.32,61.19 73.32,59.59 | 73.4,56.43 73.38,57.7
  Top 1.422: v75.68,60.52 75.68,58.95 | 75.68,58.95 75.69,57.42 | U1.4 75.68,58.95
  Top 1.676: v74.02,45.6 74.02,48.6 | v74,51.2 74.01,48.55
  other vias: 75.74,57.43
  pour Route2: 120,113 72.58,113 72.64,98.83 60.06,98.83 60,8.95 71,8.95 71,18 102.35,18 102.35,15 120,15
MP
  Top 0.406: 49.4,10 39.75,12.99
  Top 1.27: 39.75,12.99 RL1.2
  Top 2.54: U$1.IN2 95.09,10.8 77.1,10.8 74.28,2.36 55.1,2.35 49.4,10 38.4,13.4
  Bottom 0.406: 39,12.04 49.7,12.65 | 38.17,85.45 RL7.2 | R1.2 22.71,90.23 22.59,90.43 | 21.07,83.16 MP.2 | RL8.2 37.9,98.8
  Bottom 1.27: 48.76,12.43 38.96,12.43 | 39.1,73.7 39.4,73.6 | RL5.2 38.1,65.17 | 39.1,62.5 39.2,62.4 | RL3.2 38.9,41.7 38.4,42.9 38.4,42.5 | 39.5,40.2 39.6,40.1 | RL1.2 39,12.04
  Bottom 2.54: RL7.2 39.13,86.27 | RL6.2 39.1,73.7 | 39.4,73.6 49.7,73.6 | 38.1,65.17 39.1,62.5 | 39.2,62.4 49.7,62.4 | 38.4,42.5 39.5,40.2 | 39.6,40.1 49.7,40.1 | MP.1 26.92,83.1 26.05,84.05
  Bottom 3.81: 49.7,12.65 48.76,12.43 | 37.9,98.8 22.59,90.43
  Bottom 4.5: MP.2 MP.1 | 22.71,90.23 21.07,83.16
  Bottom 5: 39.13,86.27 49.6,86.3 49.7,73.6 49.7,62.4 49.7,40.1 49.7,12.65 | 38.96,12.43 49.67,12.42
  Bottom 6.452: 26.05,84.05 31.09,85.44 38.17,85.45
N$1
  Top 0.61: R51.2 65.23,9.15 65.22,12.24 67.36,12.25 O1.1
N$2
  Top 0.61: R52.2 65.35,20.16 65.34,23.48 67.36,23.48 O2.1
N$3
  Top 0.406: 68.61,40.24 O3.1
  Top 0.61: R53.2 65.63,39.22 66.1,40.24 68.61,40.24
N$4
  Top 0.406: 69.09,51.2 O4.1
  Top 0.61: R54.2 64.68,48.64 66.1,51.2 69.09,51.2
N$5
  Top 0.406: 69.15,62.43 O5.1
  Top 0.61: R55.1 65.48,61 66.24,62.43 69.15,62.43
N$6
  Top 0.61: U4.3 91.39,45.73 92.25,44.87 92.24,36.32 94.83,31.78 102.89,19.91 SG1.-
N$7
  Top 0.406: 69.3,73.61 O6.1
  Top 0.61: R56.1 65.67,72.15 66.59,73.61 69.3,73.61
N$8
  Top 0.406: 69.52,84.78 O7.1
  Top 0.61: R57.1 64.68,82.61 66.71,84.78 69.52,84.78
N$9
  Top 0.254: 77.25,77.48 R83.1 76.61,77.43 76,79 75.5,79 | 75.5,79 73.5,79 T71.3 | 75.5,79 75.5,75.5 71.5,75.5 71,76 71,88 70.5,88.84 70.53,93.2 69.68,93.82 67.69,93.8 R58.2
N$10  (via drill 0.61)
  Top 0.254: C71.2 119.5,99 118,100.5 118,102.5 119,103.5 R78.1 119,104 v118,105 | R77.1 108,109 118.5,109 118.5,112 J9.3
  Bottom 0.254: v118,105 116,107 116,111 117.5,111 118.5,112 J9.3
N$11
  Top 0.406: 69.09,95.99 O8.1
  Top 0.61: R58.1 65.99,95.99 69.09,95.99
N$12  (via drill 0.61)
  Top 0.254: v73.5,102.5 74.5,101.5 U6.10 | v66.8,10.7 67.53,9.08 R51.1
  Bottom 0.254: v73.5,102.5 73.5,98.5 71,98.5 65.82,93.24 65.83,92.83 65.75,69.24 65.74,68.96 65.74,67.87 65.58,67.58 65.55,11 v66.8,10.7
N$13  (via drill 0.61)
  Top 0.254: v71,97 73,99 73,100 74.5,100 U6.11 | v66.67,21.99 67.66,19.53 67.58,19.69 R52.1
  Bottom 0.254: v71,97 66.5,92.5 v66.67,21.99
N$14  (via drill 0.61)
  Top 0.254: v76.5,98.5 75,98.5 U6.12 | v70.5,38 68.37,37.58 R53.1
  Bottom 0.254: v76.5,98.5 76.5,92 70.79,91.99 70.8,90.07 69.33,90.07 68.74,89.77 68.5,61.5 70.52,60.74 v70.5,38
N$15  (via drill 0.61)
  Top 0.254: v73,97.5 74.5,97.5 U6.13 | v69.51,49.15 67.82,49.15 R54.1
  Bottom 0.254: v73,97.5 71.34,95.73 70.51,95.41 67.03,91.96 67.12,49.97 v69.51,49.15
N$16
  Top 0.61: T73.3 110.78,73.9 R82.1
N$17  (via drill 0.61)
  Top 0.254: 75.5,80.5 77.5,80.5 77.5,83.5 R72.2 | 75.5,80.5 73,80.5 72.5,80 72.5,77.5 T71.1 | v75.5,73.5 74.5,72.5 R71.1 | 75.5,80.5 v75.5,80
  Bottom 0.254: v75.5,80 v75.5,73.5
N$18  (via drill 0.61)
  Top 0.254: v73.5,90 73.5,93.5 74.5,93.5 U6.16 | v70,82.54 68.54,82.56 R57.2
  Bottom 0.254: v73.5,90 73.5,83.5 71,83.5 v70,82.54
N$19  (via drill 0.61)
  Top 0.254: v64.75,90.75 66,92 66,94.5 66.5,95 66.5,95.25 68.5,95.25 68.75,95 74.5,95 U6.15 | v63.25,70.25 63.75,69.75 67.5,69.75 67.5,71 R56.2
  Bottom 0.254: v64.75,90.75 64.75,80.5 65,80.25 65,70.25 v63.25,70.25
N$20  (via drill 0.61)
  Top 0.254: v73,96 74.5,96 U6.14 | v69.59,59.67 68.89,60.03 R55.2
  Bottom 0.254: v73,96 71.53,94.89 70.7,94.59 68,91.92 67.96,60.48 69.54,59.74 v69.59,59.67
N$21
  Bottom 1.27: RL8.3 35.26,91.48 | 55.14,108.59 55.29,108.58 | J7.1 55.53,108.64
  Bottom 1.778: 55.53,108.64 55.29,108.58
  Bottom 2.184: 42.8,96.1 43.02,96.27
  Bottom 2.54: 35.26,91.48 42.8,96.1 | 43.02,96.27 46.48,98.45 51.33,104.88 55.14,108.59
N$22
  Top 0.406: 13.39,15.95 13.34,15.77 | 32.6,12.5 32.67,12.44 | 20.49,8.09 20.89,7.86 | 20.89,7.86 20.99,7.8 | J1.3 20.89,8.04 20.89,7.86
  Top 1.27: RL1.3 35.1,6.6
  Top 1.778: 32.67,12.44 32.5,12.3
  Top 2.54: 20.49,8.09 20.49,12.5 | 13.39,15.95 13.4,21.57 9.6,25.1 C101.2 C101.1 | 35.1,6.6 32.67,12.44 | 13.34,15.77 16.4,12.5 20.49,12.5 | 20.49,12.5 32.6,12.5
N$23
  Top 0.813: O1.4 60.4,7.12 RL1.5 D51.A
N$24
  Top 0.406: 60.44,17.38 RL2.5
  Top 0.813: RL2.5 60.94,18.45 O2.4 | D52.A 60.44,17.38
N$25
  Top 0.813: O3.4 60.4,36.48 RL3.5 D53.A
N$26
  Top 0.813: O5.4 60.4,58.74 RL5.5 D55.A
N$27  (via drill 0.61)
  Top 0.254: v102,46.5 101,47.5 C9.2 | v98.5,42.5 95,42.5 95,44.5 U4.5
  Bottom 0.254: v102,46.5 102,42.5 v98.5,42.5
N$28
  Top 1.27: RL2.3 35.21,17.82 | 55.2,30 R100.1
  Top 2.54: 35.21,17.82 36.2,20 45.2,22.9 55.2,30
N$29
  Top 0.813: O4.4 60.4,47.46 RL4.5 D54.A
N$30  (via drill 0.61)
  Top 0.254: T60.1 75.5,106.5 77.5,104.5 77.5,104 C60.1 78,104 80,104 | v69,112 67.5,113.5 O60.4 | v79,111.5 80,110.5 80,104 | 80,104 R63.2
  Bottom 0.254: v69,112 69.5,111.5 v79,111.5
N$31  (via drill 0.61)
  Top 0.254: 116.5,35.5 R7.2 116.24,35.43 116.24,33.49 D1.C | 106,30.5 106,34.5 T1.3 106.3,34.98 v108.58,34.98 | 106,30.5 105,29.5 C10.2 | 106,30.5 93.5,43 93.5,45.5 94.5,45.5 U4.6 95,46 98,46 99,47 99,50 96,50 95.5,49.5 94,49.5 92.5,48 92.5,47 90,47 U4.2
  Bottom 0.254: v108.58,34.98 115.33,34.98 116.24,34.06 116.24,33.49 D1.C
N$32  (via drill 0.61)
  Top 0.254: 106.5,37.5 107,38 107,42 R10.1 107,42.5 107,43.5 99.5,51 99.5,57.5 v99,58 | 106.5,37.5 105,36 105,33 T1.1 | 106.5,37.5 109.5,37.5 110.5,38.5 R5.2
  Bottom 0.254: v99,58 97.5,59.5 90.5,59.5 87,63 MKR1000.P$20
N$33
  Top 0.406: 26.3,8.04 26.14,8.05 26.14,8.04 J1.1
  Top 1.778: 26.56,7.81 26.14,8.05
  Top 2.54: 26.56,7.81 28.28,6.74 28.26,2.37 12.16,2.37 C101.3 C101.4
N$34
  Top 0.406: C102.1 23.75,39.4 | 9.35,50.53 9.68,50.2 J2.P$1 | 23.9,39.1 23.7,38.9
  Top 1.27: R100.2 44.4,30.3
  Top 1.778: 23.9,39.1 23.75,39.4
  Top 2.54: 44.4,30.3 48.2,32.7 48.2,37.5 44.3,39.1 23.9,39.1 | 9.35,50.53 13.55,50.53 16.5,48.4 16.5,41.5 18.8,39.4 23.75,39.4 | 23.7,38.9 C102.2
N$35
  Bottom 0.406: C102.3 23.7,16.9 | 24.1,22.9 23.7,22.7 | 9.14,36.86 J2.P$6
  Bottom 1.778: 23.7,22.4 24.1,22.9
  Bottom 2.54: RL2.4 36.34,21.07 32.2,22.9 29,22.9 24.1,22.9 18.7,22.91 18.7,32.1 10.95,36.61 9.14,36.86 | C102.3 C102.4 23.7,22.4
N$36
  Bottom 1.27: RL3.3 34.87,34.93 | 38.1,25.1 RL2.2
  Bottom 2.54: 34.87,34.93 33.73,32.4 33.72,28.41 38.1,25.1
N$37
  Top 0.406: 22.53,45.23 22.4,45.2 | C103.1 21.71,45.25 22.41,45.31 22.4,45.35 | 9.37,58.03 8.38,57.55 8.82,57.9 J3.P$1 | C103.2 22.36,47.79
  Top 1.27: RL4.3 35.1,46.5
  Top 1.778: 22.4,45.2 22.41,45.31
  Top 2.54: 35.1,46.5 30.3,46.5 28.16,45.22 26.25,45.24 22.53,45.23 | 8.38,57.55 16.18,57.56 22.36,51.77 22.36,47.79 | 22.4,45.35 C103.2
N$38
  Bottom 0.406: J3.P$6 9.06,70.83 8.21,71.15 | 22.47,72.78 21.91,72.75 C103.3 | 29.4,63.25 29.4,63.2
  Bottom 1.778: RL4.4 41.5,46.48 | 22.28,71.09 22.29,71.31 22.47,72.78
  Bottom 2.54: 41.5,46.48 40.75,47.88 29.4,54.4 29.4,63.2 | 8.21,71.15 22.28,71.09 | C103.3 C103.4 29.4,63.25
N$39
  Bottom 1.27: RL5.3 35.1,57.6 | 38.3,54.1 RL4.2
  Bottom 2.54: 35.1,57.6 38.3,54.1
N$40
  Top 0.813: O6.4 60.4,69.92 RL6.5 61.38,68.49 D56.A
N$41
  Top 0.813: O7.4 60.4,81.3 RL7.5 60.98,79.86 D57.A
N$42
  Bottom 0.254: JP1.2 106,39.5 106,49 107,49 112,54 112,73 107,73 MKR1000.P$10
N$43
  Top 0.406: 60.45,91.24 RL8.5
  Top 0.813: RL8.5 60.4,92.18 O8.4 | D58.A 60.45,91.24
N$44  (via drill 0.61)
  Top 0.254: v101,93 102,94 U5.10 | v90.5,95 91.5,96 91.5,101.5 R9.1
  Bottom 0.254: v101,93 99,95 v90.5,95
N$45  (via drill 0.61)
  Top 0.254: 103.37,67.86 102.87,67.78 R43.2 103.5,68.5 105,70 v105,73
  Bottom 0.254: v105,73 105,85 108.5,85 117.5,76 118,76 J8.4
N$46
  Bottom 0.406: RL6.3 34.95,68.85 | 9.76,86.11 9.91,85.6 J4.3
  Bottom 1.778: 34.95,68.85 35,68.8
  Bottom 2.54: 9.76,86.11 13.36,86.07 13.9,84.73 15.44,78.95 19.4,76.9 26.8,76.92 34.95,68.85
N$47
  Top 0.406: RL7.3 35,80.3 33.8,81.9 | 44.15,109.62 44.07,108.93 J5.2
  Top 1.27: 29,105.4 29.03,105.6 | 33.38,113.51 33.47,113.6
  Top 1.778: 33.47,113.6 33.4,113.6
  Top 2.54: 44.15,109.62 44.15,113.6 33.47,113.6 | J6.1 33.38,113.51
  Top 3.81: 31.6,103.1 29,105.4
  Top 6.452: 33.8,81.9 29.71,88.8 29.73,93.59 31.6,97.4 31.6,103.1 | 29.03,105.6 J6.1
N$48  (via drill 0.61)
  Top 0.254: v101,97 101,94.5 U5.11 | v92.5,100 93,100.5 93,101.5 R9.2
  Bottom 0.254: v101,97 101,101 93.5,101 v92.5,100
N$49  (via drill 0.61)
  Top 0.254: v100,96 99.5,95.5 99.5,94.5 U5.12 | v93.5,96 93.5,100.5 94,101 94,101.5 R9.3
  Bottom 0.254: v93.5,96 v100,96
N$50  (via drill 0.61)
  Top 0.254: v99,98 99,96.5 98.5,96 98.5,94.5 U5.13 | v96,99 95.5,99.5 95.5,101.5 R9.4
  Bottom 0.254: v99,98 98,99 v96,99
N$51
  Top 0.254: R9.16 91.5,108.5 88.5,111.5 88.5,113.5 87.5,114.5 82.5,114.5 82.5,113 X1.1
N$52
  Top 0.254: R9.15 93,108 92.5,107.5 92.5,107 85,107 85,112.5 X1.2
N$53
  Top 0.254: R9.14 94,108 94,107.5 93,106.5 83.5,106.5 83.5,113.5 84,114 87,114 87,113 X1.3
N$54
  Top 0.254: R9.13 95.5,108.5 95,109 95,109.5 93,111.5 90,111.5 90,112.5 X1.4
N$55
  Top 0.61: Q1.1 U3.1
N$56
  Top 0.61: Q1.2 U3.2
N$57
  Top 0.254: U3.7 118.5,44 120,44 120,46.5 112,54.5 109,54.5 109,40 108.5,39.5 JP1.1
N$58  (via drill 0.61)
  Top 0.254: 114.5,36 R7.1 114.19,35.43 114.19,34.86 v114.99,34.06 | v111,37 110,36 R6.2 109.5,35.5 109.5,33.49 | 109.5,33.49 109.5,26.5 105,26.5 93,38.5 93,47 94.5,47 U4.7 | 109.5,33.49 110.3,33.49 D1.A
  Bottom 0.254: v114.99,34.06 110.98,34.06 110.41,33.49 D1.A
N$59
  Top 0.254: U5.14 97,94.5 97,101.5 R9.5
N$60
  Top 0.254: R9.12 96.5,108.5 96.5,109.5 93.5,112.5 92.5,112.5 X1.5
N$61  (via drill 0.61)
  Top 0.254: v96,97 96,94.5 U5.15 | v98,97 98,101.5 R9.6
  Bottom 0.254: v98,97 v96,97
N$62
  Top 0.254: R9.11 98,108.5 97.5,109 97.5,110 95,112.5 X1.6
N$63  (via drill 0.61)
  Top 0.254: v94.5,97 94.5,94.5 U5.16 | v99,100 99.5,100.5 99.5,101.5 R9.7
  Bottom 0.254: v94.5,97 94.5,100 v99,100
N$64
  Top 0.254: U5.17 93,94 93,92.5 92,91.5 88,91.5 88,100 91,103 100.5,103 100.5,102 R9.8
N$65
  Top 0.254: 99.33,108.58 R9.10 99.5,108.5 99,109 99,111 97.5,112.5 X1.7
N$66
  Top 0.254: R9.9 100.5,108.5 100,109 100,112.5 X1.8
N$67  (via drill 0.61)
  Top 0.254: v102.5,100.5 102.5,112.5 X1.9
  Bottom 0.254: v102.5,100.5 102.5,94 103,94 103.5,93.5 103.5,91 85,91 83,89 83,61 86.5,61 MKR1000.P$19
N$68  (via drill 0.61)
  Top 0.254: v83,92.5 83,85 85,83 85,60 86.5,58.5 MKR1000.P$18
  Bottom 0.254: v83,92.5 83.5,92.5 83.5,98.5 87,102 94.5,102 105,112.5 X1.10
N$69  (via drill 0.7)
  Top 0.406: 69.7,104.2 O60.2
  Top 1.27: R61.2 D60.A | v69.7,106.1 69.7,104.2
  Bottom 1.27: D60.A 58.9,102.1 62.9,107.6 68.2,107.6 v69.7,106.1
N$70
  Top 0.254: T73.1 112.5,77 111.5,78 111.5,81.5 110.16,82.86 108.48,82.82 108.5,84 107.5,85 103.5,85 103.5,79.5 101.5,77.5 R80.2 101,77 101,74 R81.1
N$71
  Top 0.254: U3.3 113.5,42.5 115,42.5 115,49.5 113,51.5 C11.+
N$72
  Top 0.406: 64.6,102.02 D60.C
  Top 1.27: R60.2 64.6,102.02 66.62,102.42 O60.1
N$73
  Top 0.406: 22.68,110.07 22.58,109.03 J6.2
  Top 1.27: R61.1 45.38,100.32 45.6,99.6 47.2,98.9 48.6,96.6 48.6,75.5 44.5,72.8 31.6,72.8 28.9,77.1 20.4,77.1 16.8,74.52 4.9,74.52 3.1,77 2.9,77.8 2.9,91.6 21.4,104.8 22.68,110.07
N$74
  Top 0.61: 113.43,85.32 R45.2
  Top 1.016: C40.1 110.82,89.78 113.43,86.86 113.43,85.32 | J8.1 117.11,84.27 R45.2
N$75
  Top 0.254: T2.1 120.36,34.06 120.36,30.06 119.1,28.8 J11.2 119.1,28.69 120.47,27.32 120.47,22.52 R11.2
N$76
  Top 0.254: R74.1 108,96.5 108,100 R75.1 108,100.5 108,104.5 R76.2 108,105 116,97 116,95.5 116.5,95 IC1.3
N$77
  Top 0.254: 112,65 R8.2 | 115.5,65 115.5,59.5 117,59.5 U7.7
  Top 0.61: 112,65 115.5,65 118,65 J10.1
N$78
  Top 0.254: 112,68 R8.1 111.5,67.5 110.5,66.5 110.5,64 112.5,62 112.5,58 117,58 U7.6 | 118,68 J10.2
  Top 0.61: 118,68 112,68
N$79  (via drill 0.61)
  Top 0.254: v111,55.5 111,56.5 U7.4
  Bottom 0.254: v111,55.5 111,70.5 107,70.5 MKR1000.P$9
N$80
  Top 0.254: U7.1 110.5,60.5 108.5,62.5 108.5,66.5 107,68 MKR1000.P$8
N$81
  Top 0.254: 110.98,58.06 U7.3 | 110.98,59.21 U7.2 111,59 111,58 U7.3 | U7.3 110.5,58 108.5,58 108.5,55 107,53.5 MKR1000.P$2
N$82
  Top 0.254: T41.3 101,61 101.5,61.5 101.5,64 103,65.5 R43.1
N$83  (via drill 0.61)
  Top 0.254: R40.2 101.5,51.5 101.5,52 T40.1 104.5,55 104.5,63 v103.5,64 | v94.5,64 98.5,64 99.5,65 100.5,65 R44.2
  Bottom 0.254: v103.5,64 v94.5,64
N$84
  Top 0.61: R82.2 113.61,71.02 113.61,71.16 114.85,69.92 121,69.92 121.03,69.95 121.07,112.81 120.25,114.08 115.51,114.12 114.47,114.07 J9.1
N$85
  Top 0.254: T40.3 101,54.5 100,55.5 100,58.5 99,59.5 97.5,59.5 97.5,60.5 97,61 92.77,61 92.77,60 R42.2
N$86
  Top 0.254: T41.1 103,60 98,60 98,61 97.5,61.5 96.5,61.5 R41.2 96,62 92.78,62 R42.1
N$87
  Top 0.254: 78.5,80 78.5,81.5 80.5,83.5 T74.1 | 78.5,80 R83.2 | 78.5,80 R87.1
N$88  (via drill 0.61)
  Top 0.254: v93,64.5 93,65 94.5,65 R46.1
  Top 0.406: R46.1 97.32,65.33 R47.1
  Route15 0.254: v93,68.5 v93,64.5
  Bottom 0.254: v93,68.5 104.5,80 104.5,85.5 113.5,85.5 118,81 J8.2
N$89
  Top 0.254: T42.1 92.5,67.5 94.5,67.5 R46.2 95,67.5
N$90  (via drill 0.61)
  Top 0.254: 72.5,83.5 72.5,87.5 R85.2 | v80.19,81.01 82.13,80.27 R70.2 | v76.5,81.5 72.5,81.5 72.5,83.5 | 72.5,83.5 T70.1
  Bottom 0.254: v80.19,81.01 79,81.5 v76.5,81.5
N$91
  Top 0.254: T72.1 96.5,73.5 98.27,75.16 98.27,78.98 R79.2 96.57,79.44 96.57,81.44 R86.2
N$92
  Top 0.254: T72.3 95.5,71.5 101,71.5 R81.2
N$93  (via drill 0.61)
  Top 0.254: v73.5,82.5 73.5,85.5 T70.3 | v79.5,84 78,85.5 R72.1
  Bottom 0.254: v73.5,82.5 75,84 v79.5,84
N$94  (via drill 0.61)
  Top 0.254: 74.52,77.38 T71.2 74.5,77 73.5,76 72,76 72,76.5 71.5,77 v71.5,89 | v102.5,93 105.5,96 R74.2 106,96 106,95 108.26,95 | 108.26,95 109,95.3 109,96.5 110.5,98 R73.2 | 108.26,95 108.26,90.5 112,86.5 112,82 118.5,82 120,83.5 120,93.5 119,94.5 IC1.1
  Bottom 0.254: v71.5,89 71.5,91.5 101,91.5 v102.5,93
N$95  (via drill 0.61)
  Top 0.254: v119.1,36.12 120.36,36.12 T2.2
  Route15 0.254: v80.58,68.35 85.84,73.61 86.53,73.61 86.64,73.5 MKR1000.P$24
  Bottom 0.254: v119.1,36.12 96.7,36.12 81.04,51.78 81.04,67.89 v80.58,68.35
PH
  Bottom 0.406: PH.1 5.41,112.07 4.4,106.88 | 4.45,111.55 3.49,107.45 PH.2 4.45,107.88 | 4.4,100.18 F1.1
  Bottom 6.452: 4.4,106.88 4.45,111.55 | 4.45,107.88 4.4,106.88 | 4.4,106.88 4.4,100.18
SCL  (via drill 0.61)
  Top 0.254: R3.1 89.47,78.42 91.94,78.41 91.94,83.5 91.69,84.44 U5.1 91.5,85 v88.5,88 | v85.5,90 84.5,91 U6.1 | v120.5,42.5 118.5,42.5 U3.6 | v104.5,52 105,52.5 105,64 106.5,65.5 MKR1000.P$7 | v94.5,52 96.5,52 U2.6
  Bottom 0.254: v85.5,90 87.5,88 v88.5,88 89,87.5 92,87.5 95,84.5 95,71.5 94.5,71.5 92,69 92,65.5 | v120.5,42.5 116,38 109.5,38 109,37.5 105,37.5 104.5,38 v104.5,52 | v94.5,52 100,57.5 100,61.5 92.5,61.5 91,63 91,65.5 92,65.5 | 92,65.5 106.5,65.5 MKR1000.P$7
SDA  (via drill 0.61)
  Top 0.254: v86.5,87.5 86.5,92.5 84.5,92.5 U6.2 | v91.5,86.5 93,86.5 93,85 U5.2 93.04,84.4 93.05,81.14 92.67,80.59 92.67,79.8 93.32,78.79 93.33,75.52 93.24,75.49 92.36,75.5 91.32,74.5 91.31,74.37 91.31,72.44 90.5,71.5 R4.1 90.5,71 91,70.5 91,67 92,66 v92,63.5 | v110,53.5 110,40.5 113,40.5 114,39.5 114,37.5 119,37.5 119.5,38 119.5,40 118.5,41 U3.5 | v94.5,50.5 96.5,50.5 U2.5
  Bottom 0.254: v86.5,87.5 87.5,86.5 v91.5,86.5 | v110,53.5 110,63 107,63 | 107,63 106,62 | 106,62 v94.5,50.5 | 107,63 MKR1000.P$6 | v92,63.5 93.5,62 106,62
WATERLED  (via drill 0.61)
  Top 0.254: v91.9,71.47 91.9,74.2 92.33,74.57 92.55,74.78 93.9,74.78 93.9,77 95.5,77 R79.1 | v91.26,60.86 91.25,58.44 90.73,57.33 89,55.75 89,53 87,51 MKR1000.P$15
  Bottom 0.254: v91.9,71.47 91.9,70.01 90.5,68.5 90.49,62.83 90.5,62.58 91.25,61.8 v91.26,60.86
WATERON  (via drill 0.61)
  Top 0.254: v84.5,54 84.5,75.5 82.5,77.5 R70.1
  Bottom 0.254: v84.5,54 84.5,49 95,49 101.5,55.5 106.5,55.5 MKR1000.P$3
WATERSENSOR  (via drill 0.61)
  Top 0.254: R84.1 119,106 117,106 v117,101.5 117,101 117.5,100.5 117.5,100 118,99.5 118,95.5 117.5,95 IC1.2 | v119.5,100.5 119.5,101.5 R78.2 | 88.5,80.5 87,79 MKR1000.P$26 | 88.5,80.5 88.5,86.5 87.5,87.5 v87.5,101 | C14.2 89.21,79.67 88.5,80.5
  Bottom 0.254: v119.5,100.5 118.5,101.5 v117,101.5 88,101.5 v87.5,101
WATERVALVE  (via drill 0.61)
  Top 0.254: v84,80.5 81.5,83 81.5,85.5 T74.3
  Bottom 0.254: v84,80.5 84,76.5 86.5,76.5 MKR1000.P$25

## Text on the board
tPlace: 1 | 1 | 1 | X1 | 1 | 1 | 1 | 1 | 1
tNames: Water | J9 | Fan | Heater | Pump | CAT | Bowl Motor | Scopper Motor | J11 | Dosage Pump | CAT_v2.3